# Altium PCB v1.PcbDoc
Units mm, origin at the board's own origin, x right, y up, seen from the top; angles counter-clockwise.
Board outline 15 x 17 mm, 4 copper layers (Top Layer, Internal Plane 1, Internal Plane 2, Bottom Layer), stack 0.462 mm thick; 15 components, 11 nets, 64 pads, 13 vias.
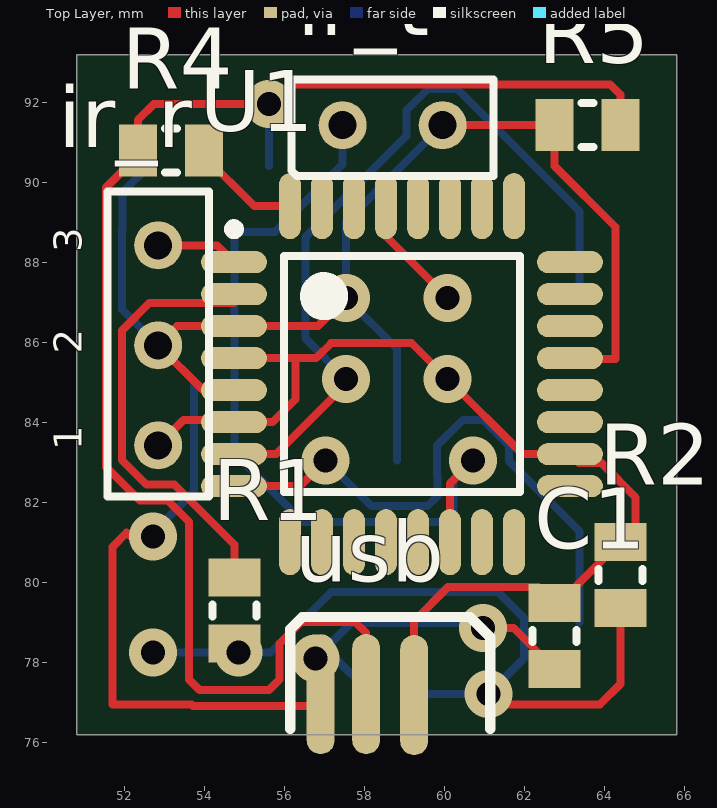
[diagram p0: Top Layer view]
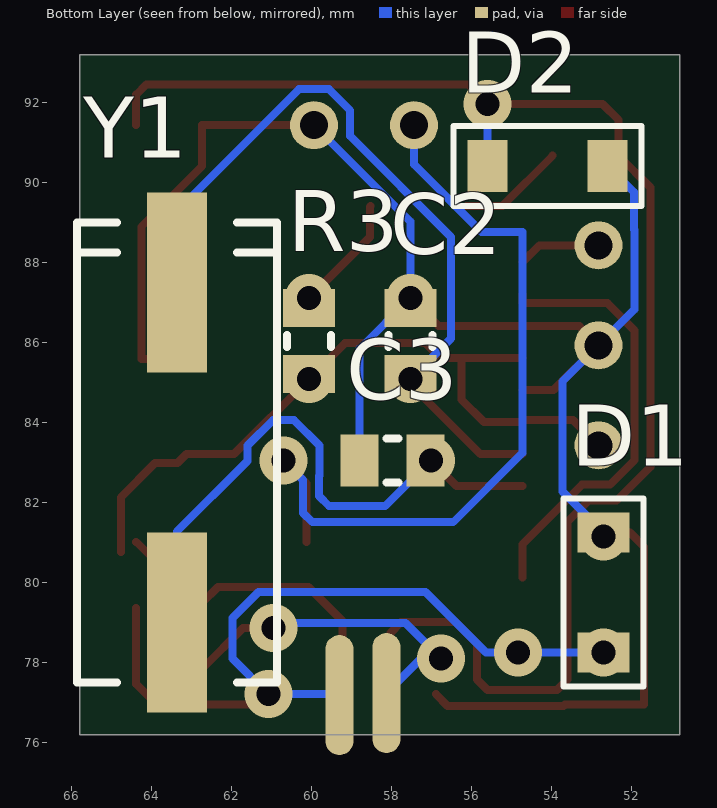
[diagram p1: Bottom Layer view, seen from below]
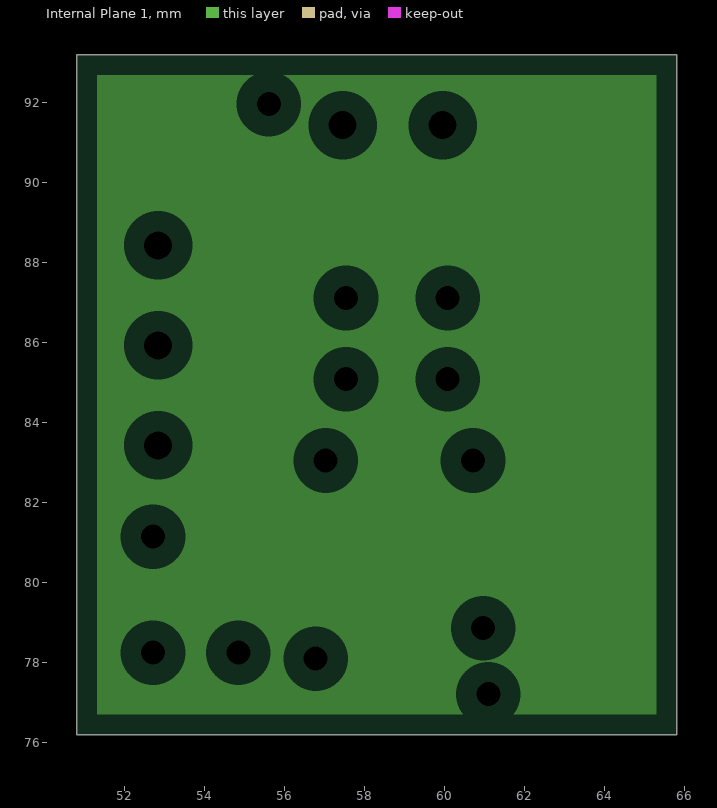
[diagram p2: Internal Plane 1, clearances drawn from the general rule]
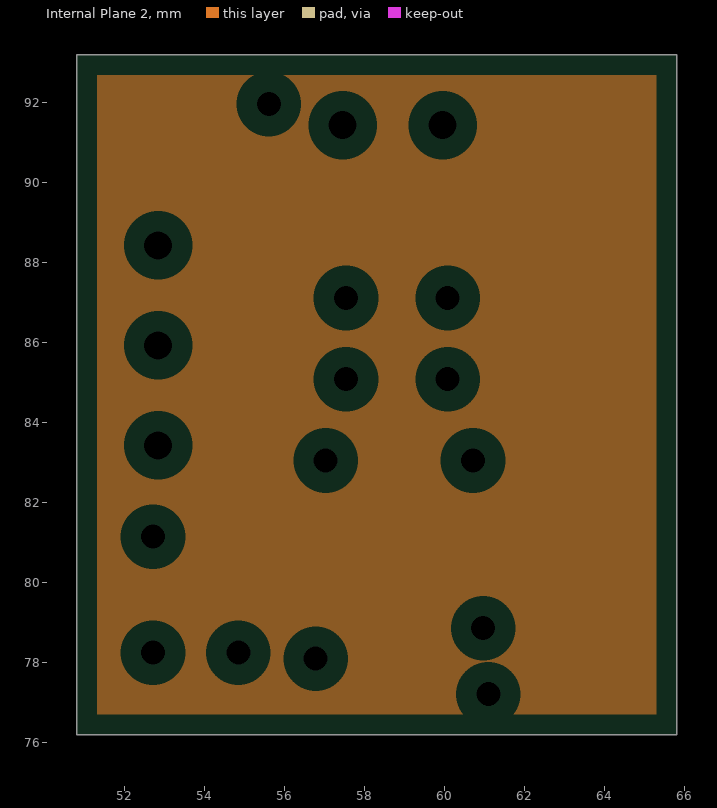
[diagram p3: Internal Plane 2, clearances drawn from the general rule]
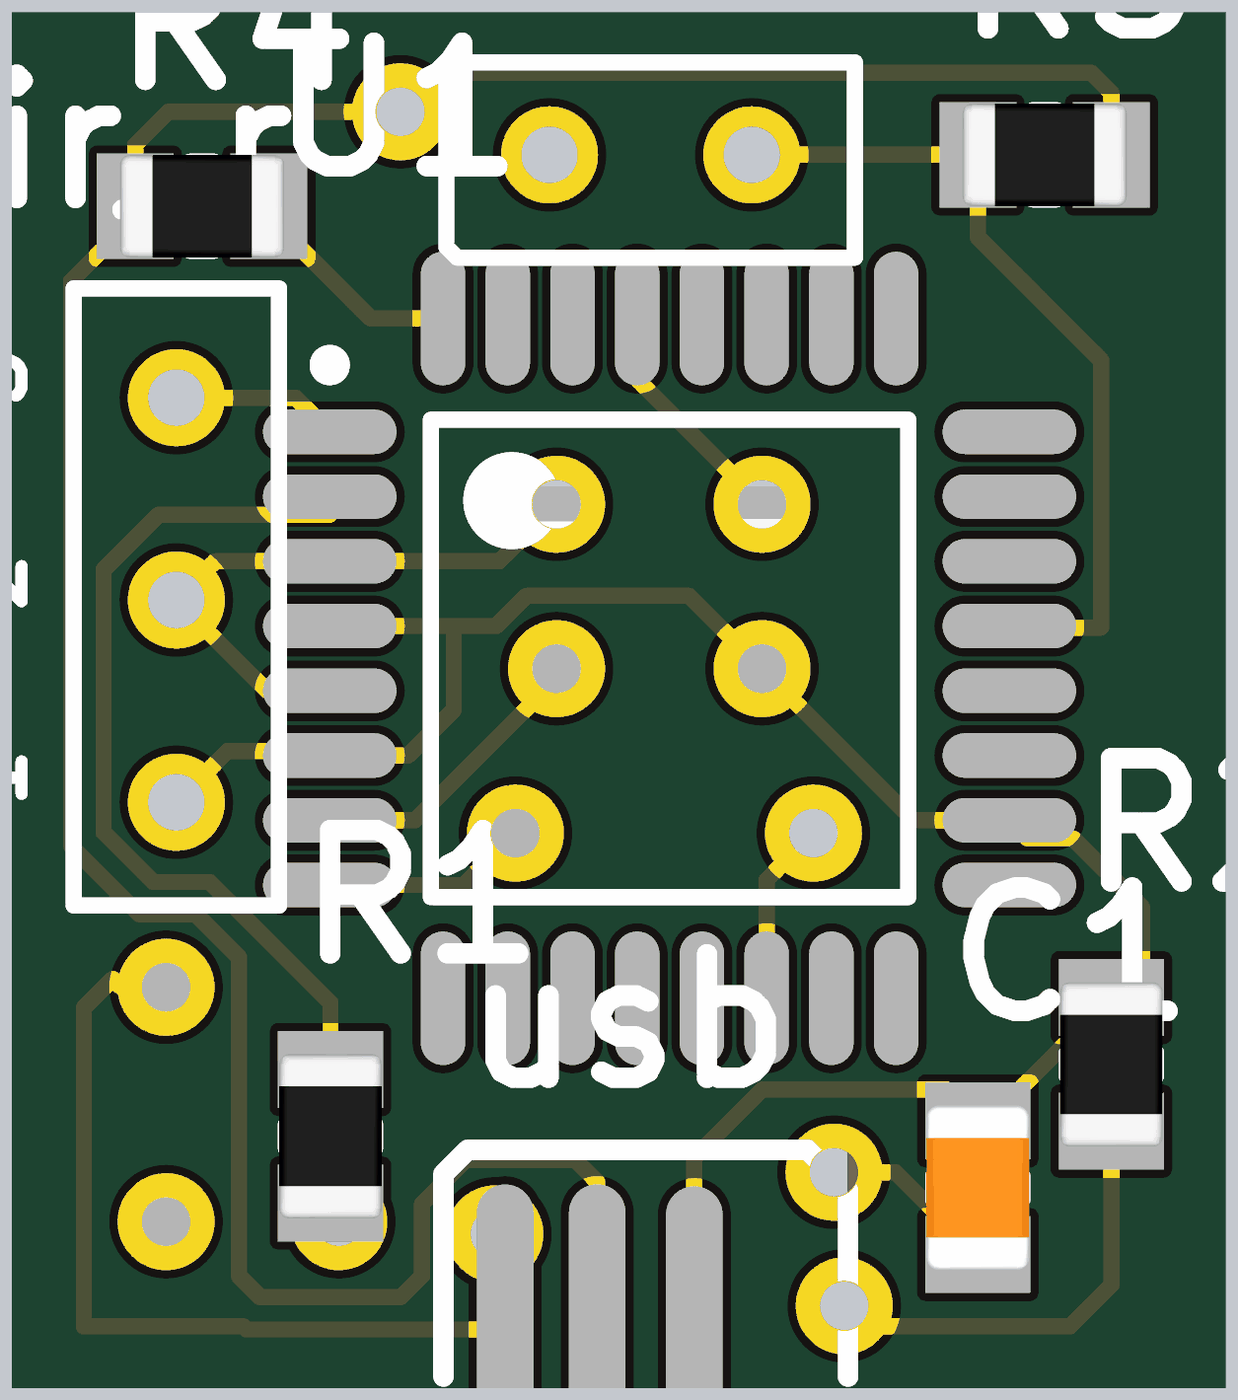
[diagram p4: 3D render of the assembled board from above, using the file's embedded part models]
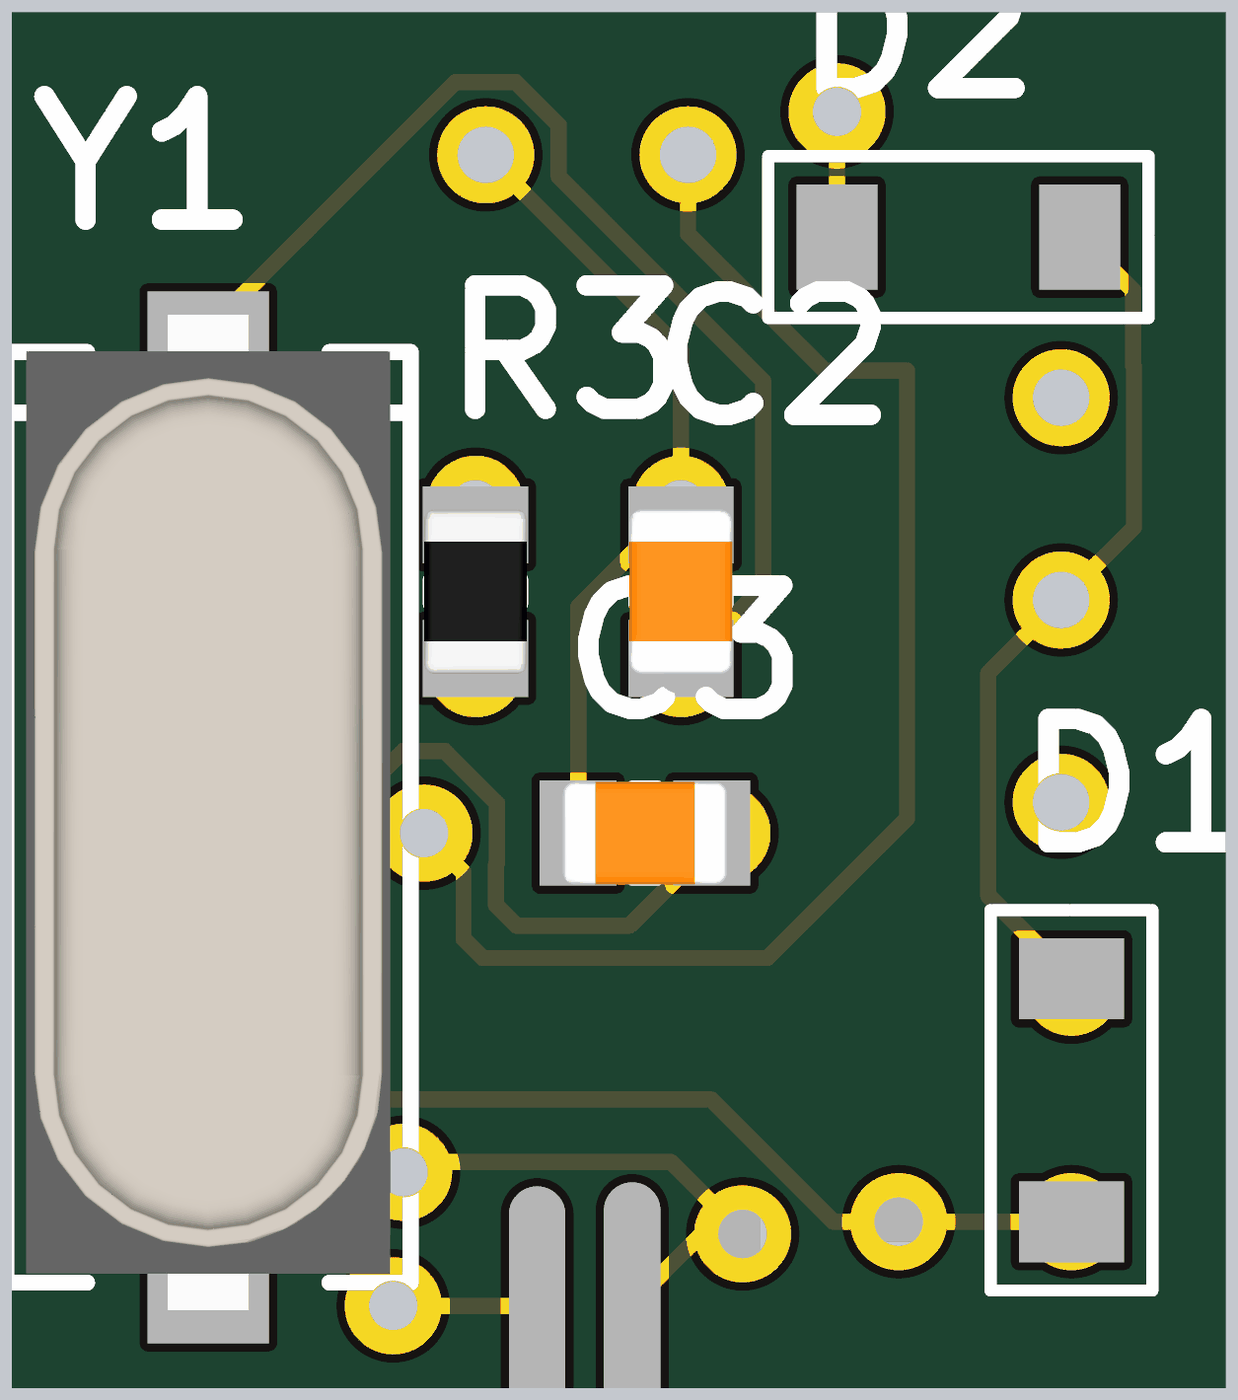
[diagram p5: 3D render of the assembled board from below, using the file's embedded part models]

## Layer stack, top to bottom
Top Solder: solder mask 0.0102, Solder Resist, Dk 3.5
Top Layer: signal copper 0.0356
Internal Plane 1: plane copper 0.0356
Internal Plane 2: plane copper 0.0356
Dielectric 1: dielectric 0.32, FR-4, Dk 4.8
Bottom Layer: signal copper 0.0356
Bottom Solder: solder mask 0.0102, Solder Resist, Dk 3.5

## Board outline
50.8,76.2 65.8,76.2 65.8,93.2 50.8,93.2

## Design rules (kind name [scope] priority, off if disabled: settings)
Clearance [All] p1: gap=0.2
PlaneClearance [All] p1: clearance=0.508
PlaneConnect [All] p1: planeconnectstyle=Relief reliefexpansion=0.508 reliefentries=4 reliefconductorwidth=0.254 reliefairgap=0.254
PolygonConnect [All] p1: connectstyle=Relief reliefconductorwidth=0.254 reliefentries=4 polygonreliefangle="90 Angle" airgapwidth=0.254
RoutingVias [All] p1: holewidth=0.5 width=1 viastyle="Through Hole" minholewidth=0.4 minwidth=0.8 maxholewidth=0.6 maxwidth=1.2
SolderMaskExpansion [All] p1: expansion=0.102
UnpouredPolygon [All] p1: allowunpoured=FALSE
Width [All] p1: maxlimit=0.2 minlimit=0.2 preferedwidth=0.2
27 further rules are at their usual default settings.

## Components (designator, comment, footprint, x,y, rotation, side; value= is the part's Value field where it differs from the comment)
C1 "4.7uf" SMD_CAP_0805 62.738,79.501 r270 top
C2 "27pf" SMD_CAP_0805 57.531,85.217 r90 bottom
C3 "27pf" SMD_CAP_0805 57.151,83.058 r0 bottom
D1 "Diode" "zener 2" 52.705,79.756 r270 bottom
D2 "Diode" "zener 2" 54.102,90.424 r0 bottom
ir_r "IR_REC" "IR Receiver" 52.832,83.439 r90 top
ir_t "IR_T" Diode 57.444,91.44 r0 top
R1 "68" "RES 0805 (2012X06L)" 54.737,80.136 r270 top
R2 "2.2k" "RES 0805 (2012X06L)" 64.389,79.375 r90 top
R3 "10k" "RES 0805 (2012X06L)" 60.071,86.867 r270 bottom
R4 "68" "RES 0805 (2012X06L)" 53.975,90.805 r180 top
R5 "1M" "RES 0805 (2012X06L)" 62.739,91.44 r0 top
U1 "ATmega8A-AU" 32A_N 58.928,85.217 r0 top
usb "Component_1" "USB Edge" 56.134,77.343 r0 top
Y1 "12 MHz" "Crystal SMD" 63.373,83.82 r270 bottom

## Footprints (in the part's own frame and the unit in brackets; to place one, negate y for a bottom-side part, rotate by r counter-clockwise, add the part's x,y. Pads: shape width x height; smd on the part's side, far side on the other; paste and mask are expansions set on the pad)
32A_N [mm] "Thin QFP, 32-Leads, Body 7x7mm, Pitch 0.8mm, IPC Medium Density"
  oval 1.65x0.55 smd: 1(-4.2,2.8) 2(-4.2,2) 3(-4.2,1.2) 4(-4.2,0.4) 5(-4.2,-0.4) 6(-4.2,-1.2) 7(-4.2,-2) 8(-4.2,-2.8) 17(4.2,-2.8) 18(4.2,-2) 19(4.2,-1.2) 20(4.2,-0.4) 21(4.2,0.4) 22(4.2,1.2) 23(4.2,2) 24(4.2,2.8)
  oval 0.55x1.65 smd: 9(-2.8,-4.2) 10(-2,-4.2) 11(-1.2,-4.2) 12(-0.4,-4.2) 13(0.4,-4.2) 14(1.2,-4.2) 15(2,-4.2) 16(2.8,-4.2) 25(2.8,4.2) 26(2,4.2) 27(1.2,4.2) 28(0.4,4.2) 29(-0.4,4.2) 30(-1.2,4.2) 31(-2,4.2) 32(-2.8,4.2)
  silkscreen extent -4.32,-2.95 2.95,3.75, body extent -3.5,-3.5 3.5,3.5, height 1.2
"Crystal SMD" [mm]
  rect 4.5x1.5 smd: 1(-3.683,0) 2(4.817,0)
  silkscreen extent -5.18,-2.5 6.32,2.5, body extent -5.64,-2.25 6.66,2.25, height 5.18
Diode [mm]
  round 1.2 hole 0.7: 1(0,0) 2(2.5,0)
  silkscreen extent -1.27,-1.27 3.77,1.14
"IR Receiver" [mm]
  round 1.2 hole 0.7: 1(0,0) 2(2.5,0) 3(5,0)
  silkscreen extent -1.27,-1.27 6.35,1.27
"RES 0805 (2012X06L)" [mm] "Chip Resistor, 2-Leads, Body 2.0x1.3mm, IPC High Density _ (0.100 W)"
  rect 0.95x1.3 smd: 1(0,0) 2(1.65,0)
  silkscreen extent 0.67,-0.55 0.97,0.55, body extent -0.19,-0.63 1.84,0.64, height 0.6
SMD_CAP_0805 [mm]
  rect 0.95x1.3 smd: 1(0,0) 2(1.65,0)
  silkscreen extent 0.67,-0.55 0.97,0.55, body extent -0.19,-0.64 1.84,0.63, height 0.65
"USB Edge" [mm]
  oval 0.7x3 smd: 1(0.762,-0.127) 3(1.9,-0.125) 5(3.1,-0.15)
  oval 0.7x3 smd far side: 2(2,-0.1) 4(3.175,-0.15)
  silkscreen extent 0,-1 5,1.8
"zener 2" [mm]
  rect 1x1.3 smd: 1(-1.5,0) 2(1.5,0)
  silkscreen extent -2.35,-1 2.35,1

## Part data
C1 C2 C3: library part Cap-Bipolar, "Bipolar Capacitor"
D1 D2: "Default Diode"
ir_r ir_t: library part Component_1
R1 R2 R3 R4 R5: library part Resistor, "Resistor"
U1: "8-bit AVR Microcontroller, 8KB Flash, 512 Bytes EEPROM, 1KB SRAM, 32-pin TQFP, Industrial Grade (-40°C to 85°C)"
Y1: library part XTAL, "XTAL Crystal"

## Via types
v1: diameter 1.2, hole 0.6, Top Layer to Bottom Layer, 13 vias

## Nets (pads, with @x,y where several pads share a name; then routed paths per layer and width w, separated by ;. In a path a pad name is that pad's centre, name@x,y a point inside that pad or via, vN(x,y) a via of type N, cw(c..) or ccw(c..) an arc to the next point about the centre after c; other vN are vias at no path point)
D-: R1.1 U1.2 | length 11
  Top Layer w0.2: U1.2 54.728,86.992 52.612,86.992 51.932,86.312 51.932,83.066 52.545,82.453 53.243,82.453 54.737,80.959 R1.1
GND: C1.2 C2.2 C3.2 D1.1 D2.1 ir_r.2 ir_t.2 R5.1 U1.3 U1.5 U1.21 usb.1 usb.2 | length 57
  Top Layer w0.2: v1(52.705,81.153) 52.149,81.153 52.046,81.256 51.689,80.899 51.689,76.962 53.663,76.962 53.701,76.924 56.604,76.924 usb.1 ; U1.5 53.954,84.817 ir_r.2 53.31,86.417 U1.3 56.826,86.417 v1(57.531,87.122) ; ir_t.2 R5.1 62.739,90.423 64.262,88.9 64.262,85.598 63.147,85.598 U1.21 ; v1(60.96,78.867) 61.722,78.867 C1.2
  Bottom Layer w0.2: D2.1 51.943,89.765 51.943,88.834 51.932,88.823 51.932,86.839 ir_r.2 53.732,85.039 53.732,82.283 D1.1 v1(52.705,81.153) ; v1(56.769,78.105) 57.657,78.993 v1@60.707,78.993 ; v1@57.145,78.232 usb.2 ; C3.2 58.801,85.852 v1(57.531,87.122) 57.531,89.027 ir_t.2
INT0: R4.1 U1.32 | length 2.7
  Top Layer w0.2: R4.1@53.975,90.678 55.236,89.417 U1.32
IR_IN: ir_r.3 U1.1 | length 2.1
  Top Layer w0.2: ir_r.3 54.306,88.439 U1.1
IR_T: ir_t.1 U1.14 | length 20
  Top Layer w0.2: U1.14 60.128,82.48 v1(60.706,83.058)
  Bottom Layer w0.2: ir_t.1 57.444,90.464 55.753,88.773 54.737,88.773 54.737,83.243 56.465,81.515 59.983,81.515 60.217,81.749 60.217,82.569 v1(60.706,83.058)
NetD2_2: D2.2 R4.2 R5.2 usb.3 | length 37.8
  Top Layer w0.2: usb.3 58.034,78.745 57.763,79.016 56.407,79.016 55.869,78.478 55.869,77.586 55.607,77.324 53.867,77.324 53.605,77.586 53.605,81.526 53.078,82.053 52.38,82.053 51.532,82.901 51.532,89.885 52.325,90.678 52.325,91.568 52.729,91.972 v1(55.602,91.972) 56.086,92.456 64.135,92.456 64.389,92.202 R5.2
  Bottom Layer w0.2: D2.2 v1(55.602,91.972)
NetR3_1: R3.1 U1.29 | length 3.2
  Top Layer w0.2: U1.29 58.547,89.398 58.547,88.646 v1(60.071,87.122)
  Bottom Layer w0.2: R3.1 v1(60.071,87.122)
UD-: D1.2 R1.2 R2.1 usb.4 | length 19.9
  Top Layer w0.2: v1(52.705,78.256) v1@52.819,78.37 ; v1(61.087,77.216) 61.341,76.962 63.881,76.962 64.389,77.47 R2.1
  Bottom Layer w0.2: v1(52.705,78.256) v1(54.84,78.256) 55.647,78.256 57.158,79.767 61.333,79.767 61.979,79.121 61.979,78.108 v1(61.087,77.216) 59.332,77.216 usb.4
VCC: C1.1 ir_r.1 R2.2 R3.2 U1.4 U1.6 U1.18 usb.5 | length 26.4
  Top Layer w0.2: ir_r.1 53.467,84.074 54.671,84.074 U1.6 55.696,84.017 56.261,84.582 56.261,85.617 ; U1.4 56.261,85.617 ; usb.5 59.234,79.046 60.08,79.892 62.347,79.892 C1.1 62.865,79.501 R2.2 ; R2.2@64.77,80.771 64.77,82.138 63.916,82.992 63.353,82.992 U1.18 61.944,83.217 v1(60.071,85.09) 59.171,85.99 57.158,85.99 56.785,85.617 56.261,85.617
  Bottom Layer w0.2: v1(60.071,85.09) R3.2
XTAL1: C2.1 U1.7 Y1.1 | length 19.6
  Top Layer w0.2: U1.7 55.785,83.217 57.531,84.963 v1(57.531,85.09)
  Bottom Layer w0.2: C2.1 v1(57.531,85.09) 56.515,86.106 56.515,88.646 59.044,91.175 59.044,91.813 59.571,92.34 60.317,92.34 63.373,89.284 Y1.1
XTAL2: C3.1 U1.8 Y1.2 | length 14.8
  Top Layer w0.2: U1.8 56.382,82.417 v1(57.023,83.058)
  Bottom Layer w0.2: C3.1 v1(57.023,83.058) 58.166,81.915 59.563,81.915 59.817,82.169 59.817,82.674 59.806,82.685 59.806,83.431 60.449,84.074 60.963,84.074 61.606,83.431 61.606,83.047 63.373,81.28 Y1.2
pads on no net: U1.9 U1.10 U1.11 U1.12 U1.13 U1.15 U1.16 U1.17 U1.19 U1.20 U1.22 U1.23 U1.24 U1.25 U1.26 U1.27 U1.28 U1.30 U1.31

## Text inside footprints (layer, text, board x,y; h text height)
ir_r: Top Overlay "3" at 50.927,88.265 h0.7 r90; Top Overlay "2" at 50.927,85.725 h0.7 r90; Top Overlay "1" at 50.927,83.312 h0.7 r90